# Altium PCB CT310高端控制盒右摇杆电路V1.1.PcbDoc
Units mil, origin at the board's own origin, x right, y up, seen from the top; angles counter-clockwise.
Board outline 1470 x 1470 mil, 2 copper layers (Top Layer, Bottom Layer), stack 65.792 mil thick; 2 components, 4 nets, 16 pads, 0 vias.
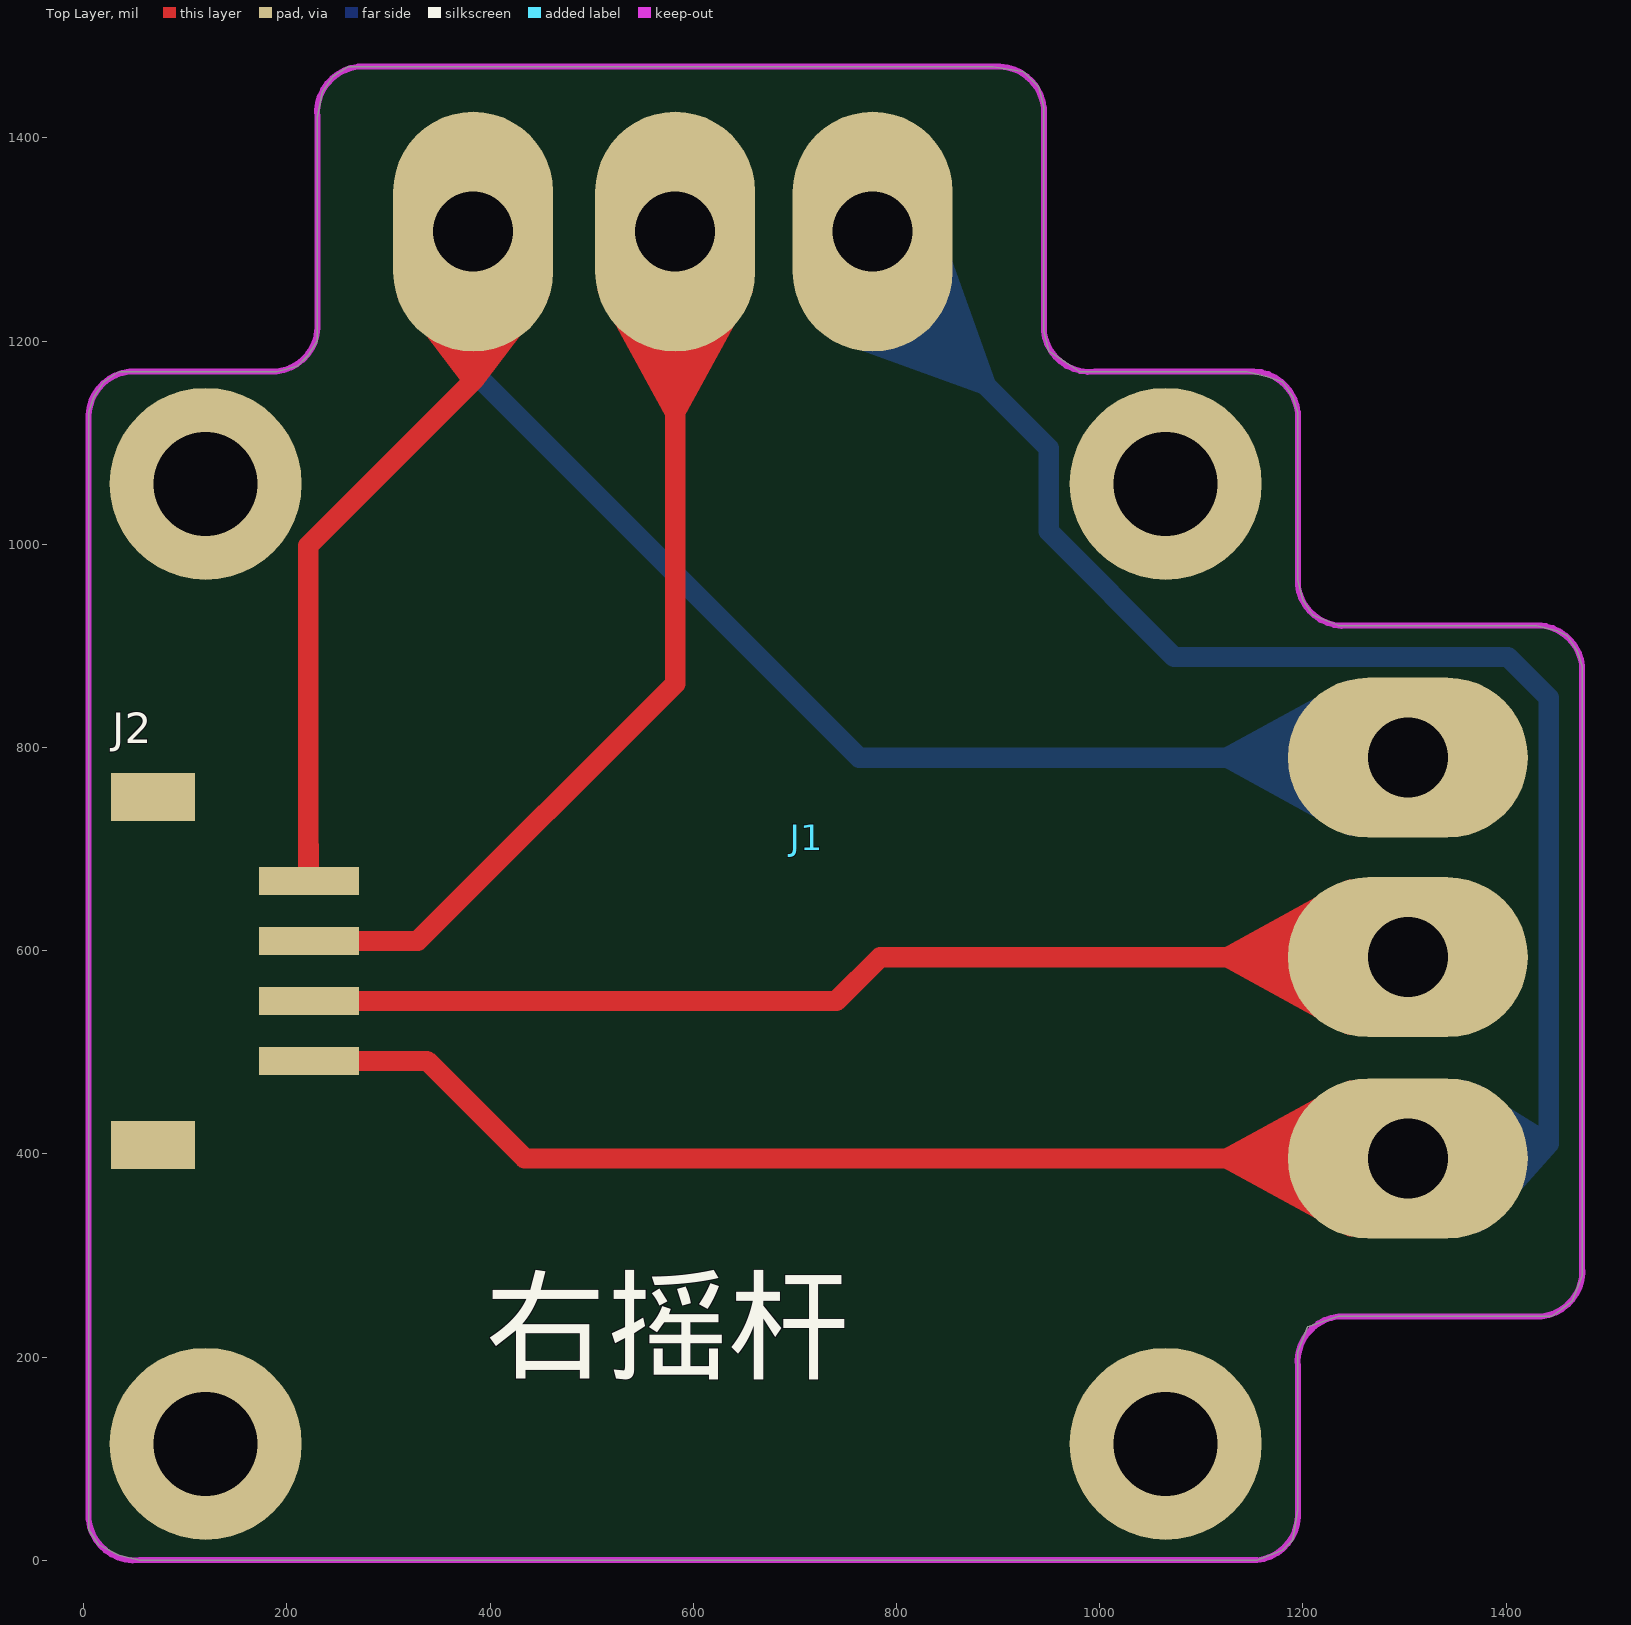
[diagram p0: Top Layer view]
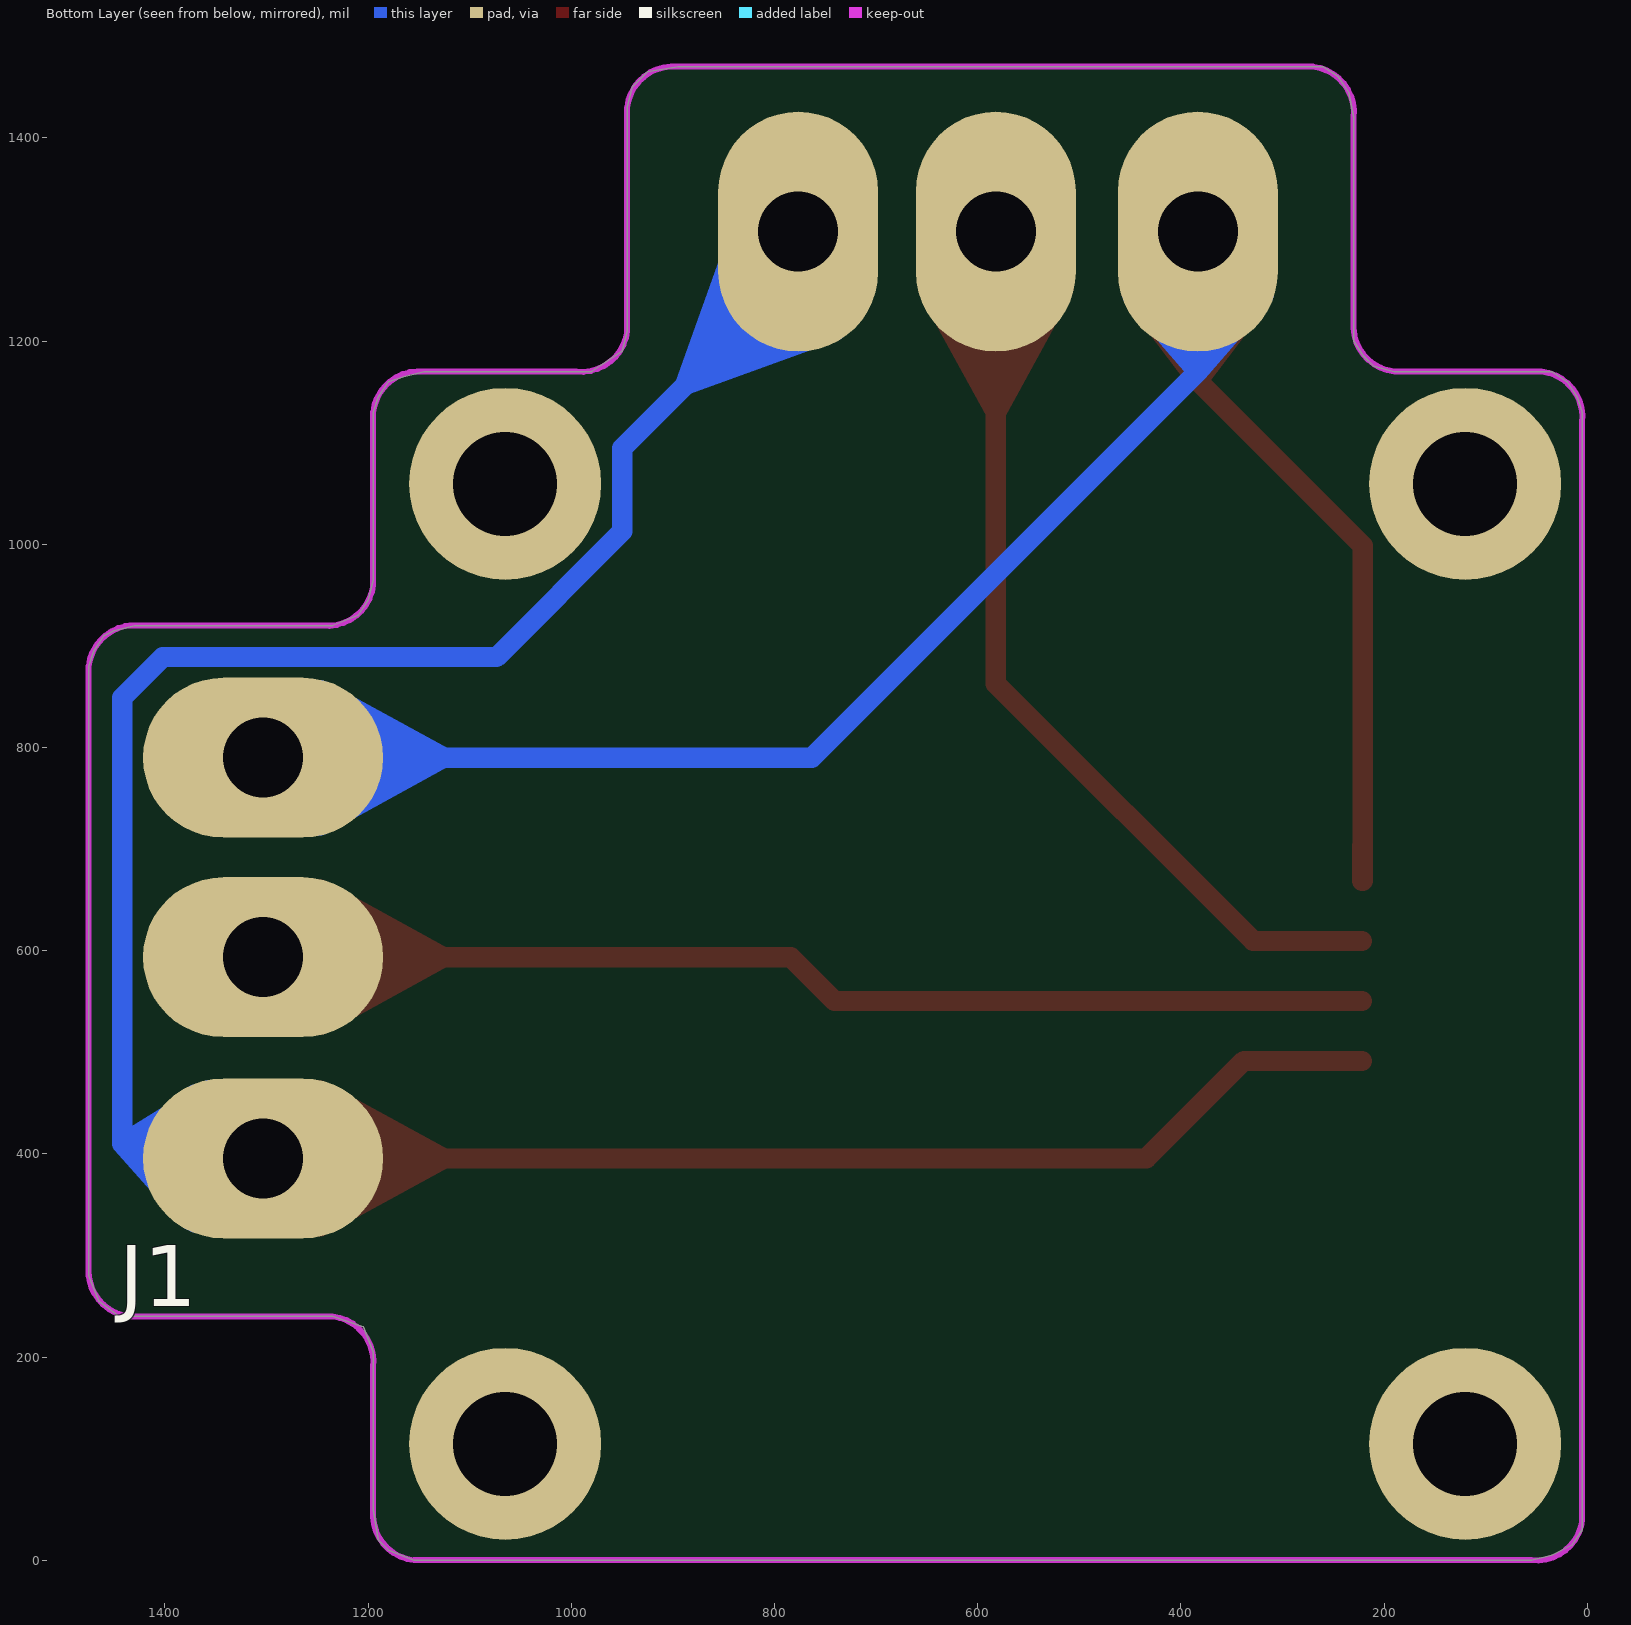
[diagram p1: Bottom Layer view, seen from below]

## Layer stack, top to bottom
Top Layer: signal copper 1.4
Dielectric: core 62.9921, FR-4, Dk 4.8
Bottom Layer: signal copper 1.4

## Board outline
5,1130 10,1145 20,1160 35,1170 45,1170 190,1170 210,1175 220,1185 230,1200 230,1220 230,1420 235,1445 245,1460 260,1470 270,1470 895,1470 925,1465 940,1450 945,1430 945,1210 950,1190 965,1180 980,1170 1010,1170 1145,1170 1165,1165 1180,1160 1190,1145 1195,1130 1195,965 1200,945 1210,930 1235,920 1430,920 1450,915 1460,910 1470,895 1475,880 1475,280 1465,255 1445,240 1435,240 1235,240 1205,230 1195,205 1195,50 1190,20 1180,10 1155,0 55,0 35,5 15,15 5,30 5,50 5,1120 5,1130

## Design rules (kind name [scope] priority, off if disabled: settings)
Clearance [All] p1: gap=10
PolygonConnect [All] p1: connectstyle=Relief reliefconductorwidth=10 reliefentries=4 polygonreliefangle="90 Angle" airgapwidth=10
RoutingVias [All] p1: holewidth=28 width=50 viastyle="Through Hole" minholewidth=28 minwidth=50 maxholewidth=28 maxwidth=50
SilkToSolderMaskClearance SilkscreenOverComponentPads [IsPad] p1: minsilkscreentomaskgap=10 clearancetoexposedcopper=TRUE
SolderMaskExpansion [All] p1: expansion=4
Width [All] p1: maxlimit=100 minlimit=10 preferedwidth=20 minimp=50.000000 maximp=50.000000 favimp=50.000000
27 further rules are at their usual default settings.

## Components (designator, comment, footprint, x,y, rotation, side; value= is the part's Value field where it differs from the comment)
J1 "H20JH" H20JH 120.16,114.57 r0 top
J2 "ZH1X4WT-1.5" ZH1X4WT-1.5 145,580 r90 top

## Footprints (in the part's own frame and the unit in brackets; to place one, negate y for a bottom-side part, rotate by r counter-clockwise, add the part's x,y. Pads: shape width x height; smd on the part's side, far side on the other; paste and mask are expansions set on the pad)
H20JH [mm]
  round 4.8 hole 2.6: 0(0,0) 0(0,24) 0(24,0) 0(24,24)
  oval 6x4 hole 2: 1(30.055,7.135) 2(30.055,12.165) 3(30.055,17.155)
  oval 4x6 hole 2: 4(16.675,30.305) 5(11.735,30.305) 6(6.685,30.305)
  body extent -3,-2.98 37.5,37.52, height 3.7
ZH1X4WT-1.5 [mm]
  rect 1.2x2.1 smd: 0(-4.35,1.95) 0(4.35,1.95)
  rect 0.7x2.5 smd: 1(-2.25,-1.95) 2(-0.75,-1.95) 3(0.75,-1.95) 4(2.25,-1.95)

## Part data
J1: library part HEADER1X6
J2: library part HEADER1X4

## Nets (pads, with @x,y where several pads share a name; then routed paths per layer and width w, separated by ;. In a path a pad name is that pad's centre, name@x,y a point inside that pad or via, vN(x,y) a via of type N, cw(c..) or ccw(c..) an arc to the next point about the centre after c; other vN are vias at no path point)
AX: J1.2 J2.2 | length 2144.4
  Top Layer w20: J2.2 741,550.47 784.03,593.5 J1.2 ; J2.2@257.21,550.47 330.98,550.47 ; J1.2@1247.02,526.91 1125.31,593.5 ; J1.2@1247.02,660.1 1125.31,593.5 ; J1.2@1255.49,545.52 1125.31,593.5 ; J1.2@1255.49,641.49 1125.31,593.5 ; J1.2@1261.08,564.92 1125.31,593.5 ; J1.2@1261.08,622.09 1125.31,593.5 ; J1.2@1264.05,593.5 1125.31,593.5
AY: J1.5 J2.3 | length 1953.2
  Top Layer w20: J2.3 329,609.53 ; J2.3@257.21,609.53 329,609.53 ; J1.5@515.57,1251.28 582.17,1129.57 ; J1.5@534.18,1259.74 582.17,1129.57 ; J1.5@553.58,1265.33 582.17,1129.57 ; J1.5@582.17,1268.31 582.17,1129.57 ; J1.5 582.17,862.69 329,609.53 ; J1.5@610.75,1265.33 582.17,1129.57 ; J1.5@630.15,1259.74 582.17,1129.57 ; J1.5@648.76,1251.28 582.17,1129.57
GND: J1.3 J1.6 J2.4 | length 4408.5
  Top Layer w20: 221,742.38 J2.4 221,668.58 221,998.38 383.35,1160.72 ; J1.6@318.21,1246.35 383.35,1160.72 ; J1.6@335.87,1257.27 383.35,1160.72 ; J1.6@354.86,1264.47 383.35,1160.72 ; J1.6@383.35,1268.31 383.35,1160.72 ; J1.6 383.35,1160.72 ; J1.6@411.83,1264.47 383.35,1160.72 ; J1.6@430.82,1257.27 383.35,1160.72 ; J1.6@448.48,1246.35 383.35,1160.72
  Bottom Layer w20: J1.6@318.94,1244.27 383.35,1170 ; J1.6@336.13,1256.22 383.35,1170 ; J1.6@354.91,1264.1 383.35,1170 ; J1.6@383.35,1268.31 383.35,1170 ; J1.6 383.35,1170 ; J1.6@411.78,1264.1 383.35,1170 ; J1.6@430.56,1256.22 383.35,1170 ; J1.6@447.75,1244.27 383.35,1170 ; J1.3@1247.02,723.36 1125.31,789.96 ; J1.3@1247.02,856.56 1125.31,789.96 ; J1.3@1255.49,741.98 1125.31,789.96 ; J1.3@1255.49,837.94 1125.31,789.96 ; J1.3@1261.08,761.37 1125.31,789.96 ; J1.3@1261.08,818.55 1125.31,789.96 ; J1.3@1264.05,789.96 1125.31,789.96 ; J1.3 763.39,789.96 383.35,1170
VCC: J1.1 J1.4 J2.1 | length 6666.3
  Top Layer w20: J2.1 338,491.42 433.95,395.47 J1.1 ; J2.1@257.21,491.42 330.98,491.42 ; J1.1@1247.02,328.87 1125.31,395.47 ; J1.1@1247.02,462.07 1125.31,395.47 ; J1.1@1255.49,347.49 1125.31,395.47 ; J1.1@1255.49,443.45 1125.31,395.47 ; J1.1@1261.08,366.89 1125.31,395.47 ; J1.1@1261.08,424.06 1125.31,395.47 ; J1.1@1264.05,395.47 1125.31,395.47
  Bottom Layer w20: J1.4@739.75,1210.31 887.85,1156.8 ; J1.4@747.88,1228.96 887.85,1156.8 ; J1.4@758.24,1246.24 887.85,1156.8 ; J1.4@776.65,1268.31 887.85,1156.8 ; J1.4 776.65,1268 950,1094.65 950,1012.57 1073.57,889 1402,889 1442,849 1442,410 ; J1.4@798.77,1286.66 887.85,1156.8 ; J1.4@816.08,1296.97 887.85,1156.8 ; J1.4@834.75,1305.05 887.85,1156.8 ; J1.1 1427.47,395.47 ; J1.1@1342.75,424.21 1442,410 ; J1.1@1347.67,443.97 1442,410 ; J1.1@1350.99,367.93 1442,410 ; J1.1@1356.75,462.78 1442,410 ; J1.1@1361.37,350.41 1442,410 ; J1.1@1375.47,334.99 1442,410 ; J1.1@1342.79,395.47 1427.47,395.47 ; J1.1@1342.79,395.47 1427.47,395.47 ; J1.1@1342.79,395.47 1442,410 ; 1427.47,395.47 1347.67,367.15 1427.47,395.47 ; 1427.47,395.47 1347.67,423.8 1427.47,395.47 ; 1427.47,395.47 1356.82,348.79 1427.47,395.47 ; 1427.47,395.47 1356.82,442.15 1427.47,395.47 ; 1427.47,395.47 1370.7,332.65 1427.47,395.47 ; 1427.47,395.47 1370.7,458.3 1427.47,395.47 ; 1427.47,395.47 1442,410
pads on no net: J1.0 J2.0

## Keep-outs
Keep-Out Layer:
  lines w5.91: 1235,920 1435,920 ; 1245,920 cw(c1240,965) 1195,960 1195,1130 ccw(c1150,1125) 1145,1170 995,1170 cw(c990,1215) 945,1210 945,1430 ccw(c900,1425) 895,1470 270,1470 ccw(c275,1425) 230,1420 230,1220 cw(c185,1215) 190,1170 45,1170 ccw(c50,1125) 5,1120 5,40 ccw(c50,45) 55,0 1155,0 ccw(c1150,45) 1195,50 1195,190 cw(c1240,195) 1235,240 1435,240 ccw(c1430,285) 1475,290 ; 1425,920 cw(c1430,875) 1475,880 1475,280

## Silkscreen, mask and mechanical layers (free items; w line width, h text height)
Top Overlay:
  text "右摇杆" at 395,160 h150

## Dimensions
55,0 to 270,1470 on Keep-Out Layer
5,40 to 1475,280 on Keep-Out Layer